# Altium PCB msp430_EMC_v1.0_fucu.PcbDoc (part 2 of 2)
Units mil, origin at the board's own origin, x right, y up, seen from the top; angles counter-clockwise.
Board outline 6328.11 x 4921.26 mil, 2 copper layers (Top Layer, Bottom Layer); 186 components, 146 nets, 623 pads, 75 vias.
Unrouted connection lines stored in the file: 47.
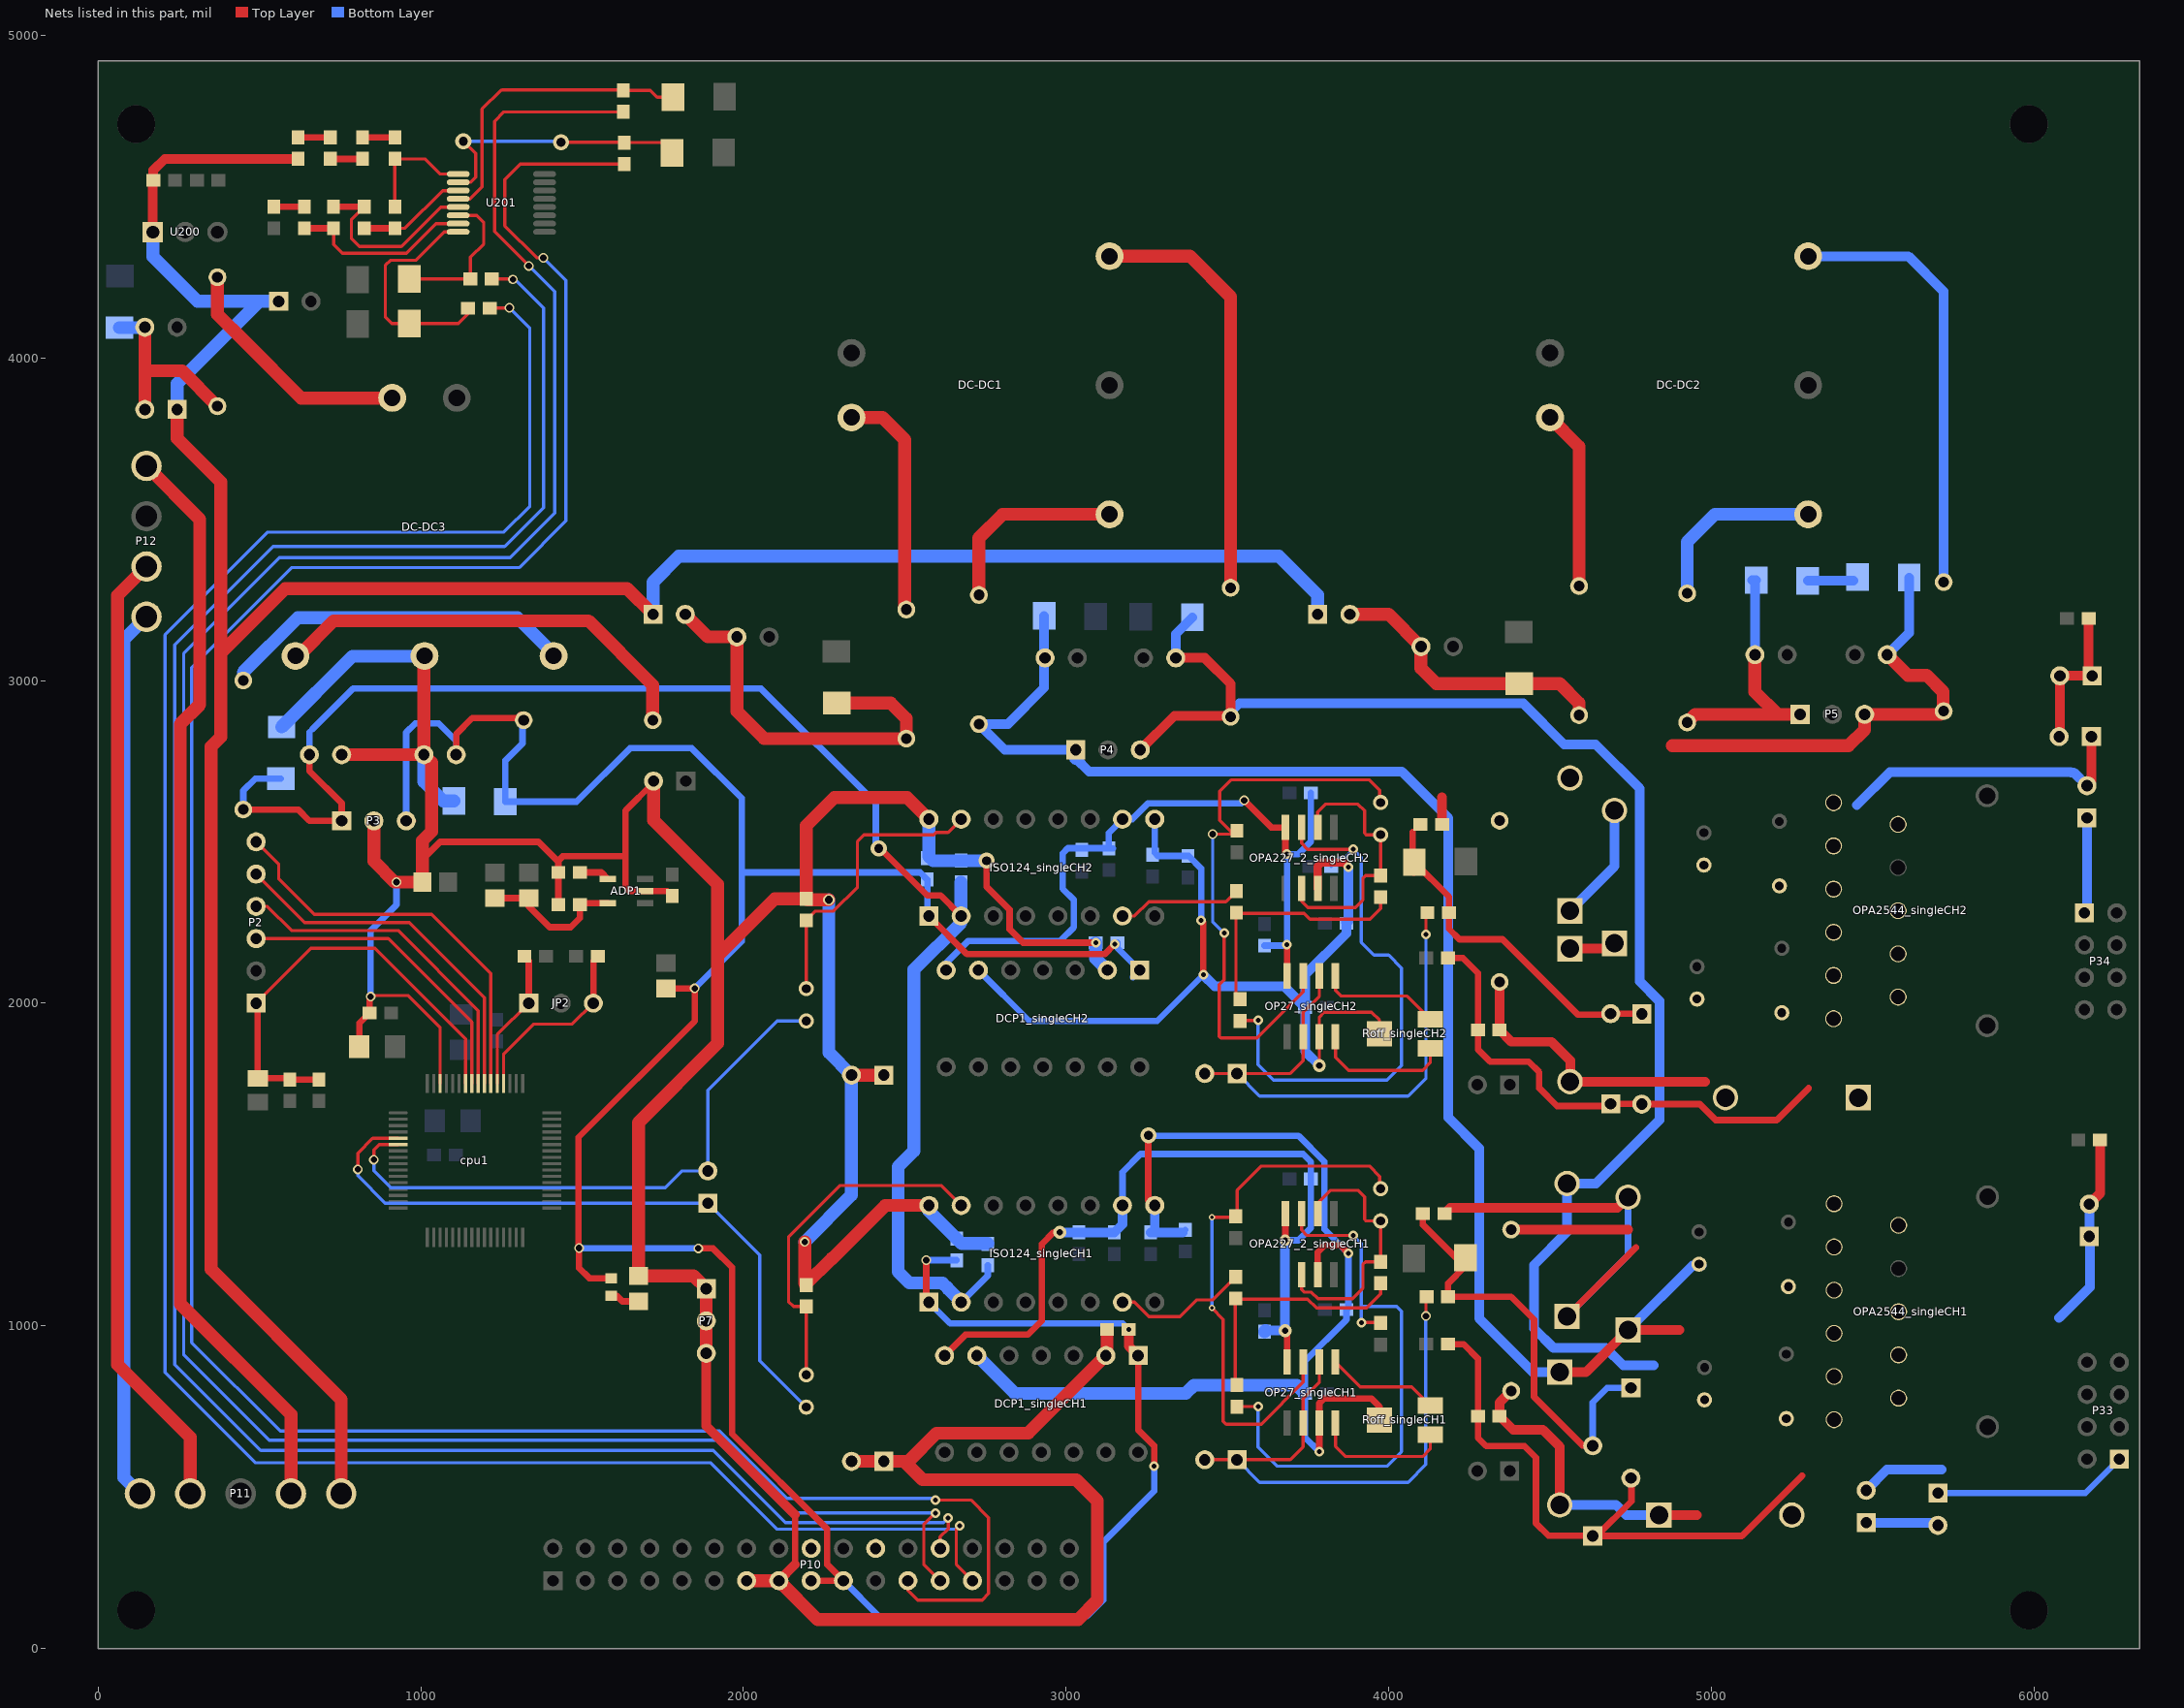
[diagram p2: the nets of this part, all layers, seen from the top]

## Via types
v1: diameter 30, hole 15, Top Layer to Bottom Layer, 29 vias
v2: diameter 30, hole 20, Top Layer to Bottom Layer, 25 vias
v3: diameter 40, hole 20, Top Layer to Bottom Layer, 10 vias
v4: diameter 50, hole 28, Top Layer to Bottom Layer, 6 vias
v5: diameter 20, hole 10, Top Layer to Bottom Layer, 2 vias
v6: diameter 35, hole 17, Top Layer to Bottom Layer, 1 vias
v7: diameter 35, hole 25, Top Layer to Bottom Layer, 1 vias
v8: diameter 50, hole 30, Top Layer to Bottom Layer, 1 vias

## Nets (pads, with @x,y where several pads share a name; then routed paths per layer and width w, separated by ;. In a path a pad name is that pad's centre, name@x,y a point inside that pad or via, vN(x,y) a via of type N, cw(c..) or ccw(c..) an arc to the next point about the centre after c; other vN are vias at no path point) (continued)
GNDB: ADP1.2 C1.2 C2.2 C3.2 C12.1 C13.1 C16_singleCH1.2 C16_singleCH2.2 cpu1.62 CT3_singleCH1.2 CT3_singleCH2.2 CT4_singleCH1.1 CT4_singleCH2.1 DC-DC3.4 DCP1_singleCH1.2 DCP1_singleCH2.2 GNDB1_singleCH1.1 GNDB1_singleCH1.2 GNDB1_singleCH2.1 GNDB1_singleCH2.2 ISO124_singleCH1.16 ISO124_singleCH2.16 LED10.2 P3.2 P7.1 P7.2 P7.3 P8.2 P10.13 P10.15 P_C8.2 P_C9.1 R5.2 Rf_singleCH1.1 Rf_singleCH2.1 TVS13.2 TVS14.1 | length 14540.6
  Top Layer w10: v2@841.54,2023.46 961.54,2023.46 1059.92,1925.08 cpu1.62@1059.92,1750.55
  Top Layer w20: C12.1@809.88,1865 809.88,1938.35 C13.1@841.54,1970 v2@841.54,2023.46 ; 1005.63,2445.63 1060,2500 1365.2,2500 1425,2440.2 ; C2.2@1426.54,2305.2 C3.2@1426.54,2405.2 1426.54,2438.66 1425,2440.2 ; 1630.96,2455.2 1440,2455.2 1425,2440.2 ; P8.2@1720.13,2682.24 1635,2597.11 1635,2360.2 1647.6,2347.6 ADP1.2@1695,2347.6 C1.2@1764.13,2347.6 ; 2160,260 2160,415 ; v4(2753.39,2441.47) 2753.39,2361.65 2825.05,2289.99 2825.05,2229.02 2866.78,2187.3 v1(3092.06,2187.3)
  Top Layer w30: P7.3@1885,915 1885,690 2160,415 ; P10.15@2110,210 2160,260
  Top Layer w40: P_C9.1@755,2770 P_C8.2@1010,2770 ; P3.2@855,2565 855,2440 920,2375 v2(925,2375) R5.2@1005.63,2375 1005.63,2445.63 1005.63,2503.67 1034.05,2532.09 1034.05,2745.95 P_C8.2@1010,2770 ; DC-DC3.4@1010,3065 P_C8.2@1010,2770 ; P8.2@1720.13,2682.24 P8.2@1721.57,2680.8 ; P8.2@1721.57,2688.26 P8.2@1721.57,2680.8 ; P7.3@1885,915 P7.2@1885,1015 P7.1@1885,1115 1845.63,1154.37 LED10.2@1675,1154.37 1675,1630 1920.29,1875.29 1920.29,2146.05 ; P10.13@2010,210 P10.15@2110,210 2230,90 3037.45,90 3097.06,149.61 3097.06,458.15 3032.17,523.03 2555.79,523.03 2498.82,580 ; Rf_singleCH1.1@2190,1131.54 v2(2190,1260) ; Rf_singleCH1.1@2192.4,1127.4 2273.93,1208.94 ; v7(2265,2320) 2198.46,2320 Rf_singleCH2.1@2195,2323.46 ; 2275.89,1208.77 2440.19,1373.07 ISO124_singleCH1.16@2575,1373.07 ; GNDB1_singleCH1.2@2335,580 GNDB1_singleCH1.1@2435,580 2498.82,580 ; GNDB1_singleCH2.2@2335,1776.93 GNDB1_singleCH2.1@2435,1776.93 ; ISO124_singleCH2.16@2575,2570 2507.47,2637.53 2282.45,2637.53 2195,2550.07 Rf_singleCH2.1@2195,2323.46 ; C16_singleCH1.2@3127.03,988.86 3127.03,911.38 DCP1_singleCH1.2@3123.53,907.88 2883.06,667.41 2598.87,667.41 2511.46,580 2498.82,580 ; P8.2@1721.57,2680.8 1721.57,2567.02 1920.29,2368.31 1920.29,2146.05 ; 1920.29,2146.05 2097.7,2323.46 Rf_singleCH2.1@2195,2323.46
  Bottom Layer w20: v2(845,2020) 845,2225 925,2305 v2(925,2375)
  Bottom Layer w40: TVS14.1@568.88,2855.87 788.01,3075 DC-DC3.4@1020,3075 ; P_C8.2@1010,2770 1010,2686.28 1069.63,2626.66 TVS13.2@1102.54,2626.66 ; v2(2190,1260) 2335,1405 GNDB1_singleCH2.2@2335,1776.93 2265,1846.93 v7(2265,2320) ; ISO124_singleCH1.16@2575,1373.07 2575,1356.1 CT3_singleCH1.2@2660.87,1270.23 2676.15,1254.95 2756.65,1254.95 CT4_singleCH1.1@2757.3,1254.3 ; ISO124_singleCH2.16@2575,2570 2575,2454.53 2588.06,2441.47 CT4_singleCH2.1@2674.42,2441.47 v4(2753.39,2441.47) ; v1(3092.06,2187.3) 3092.06,2138.64 DCP1_singleCH2.2@3128.48,2102.22
IN1: R205.1 R208.2 U201.1 | length 363.7
  Top Layer w10: R208.2@920,4468.46 R205.1@920,4616.54 1013.46,4616.54 1060.43,4569.57 U201.1@1116.14,4569.57
IN2: R208.1 R209.2 U201.3 | length 339.5
  Top Layer w10: R208.1@920,4401.54 951.54,4401.54 1068.39,4518.39 U201.3@1116.14,4518.39
  Top Layer w20: R209.2@825,4401.54 R208.1@920,4401.54
IN3: R209.1 R210.2 U201.5 | length 602.1
  Top Layer w10: R209.1@825,4468.46 785,4428.46 785,4370 810,4345 940,4345 1062.2,4467.2 U201.5@1116.14,4467.2
  Top Layer w20: R210.2@730,4468.46 R209.1@825,4468.46
IN4: R210.1 R211.2 U201.7 | length 575.3
  Top Layer w10: R210.1@730,4401.54 730,4351.63 757.27,4324.36 955.37,4324.36 1047.04,4416.02 U201.7@1116.14,4416.02
  Top Layer w20: R211.2@640,4401.54 R210.1@730,4401.54
IN_+12V: C200.2 P1.1 P11.5 P_F1.1 P_F2.1 P_F3.1 R200.2 U200.1 | length 8973.9
  Top Layer w30: U200.1@170,4390 170,4548.46 C200.2@171.54,4550 171.54,4581.54 206.54,4616.54 R200.2@620,4616.54
  Top Layer w40: P_F3.1@245,3840 245,3750 380,3615 380,3085 ; P11.5@753.62,480 753.62,771.38 350,1175 350,2795 380,2825 380,3085 ; P_F1.1@1720,3205 1640,3285 580,3285 380,3085
  Bottom Layer w40: U200.1@170,4390 170,4313.62 308.62,4175 500,4175 ; P_F3.1@245,3840 245,3920 500,4175 ; P1.1@560,4175 500,4175 ; P_F1.1@1720,3205 1720,3305 1800,3385 3660,3385 3780,3265 P_F2.1@3780,3205
LED_HIGH: P10.27 R207.2 | length 7145.7
  Top Layer w10: R207.2@1213.95,4154.09 v2@1274.09,4154.09 ; v1(2670,380) 2659.94,369.94 2659.94,260.06 P10.27@2710,210
  Bottom Layer w10: v2(1275,4155) 1338.14,4091.86 1338.14,3539.56 1258.3,3459.72 526.05,3459.72 207.75,3141.42 207.75,854.98 486.98,575.74 1898.05,575.74 2103.79,370 2660,370 v1(2670,380)
LED_LOW: P10.23 R203.2 | length 8208.8
  Top Layer w10: v2(1380,4310) 1360,4310 1261.01,4408.99 1261.01,4552.95 1308.39,4600.33 R203.2@1631.06,4600.33 ; P10.23@2510,210 2510,180 2540,150 2740,150 2760,170 2760,405 2705,460 v1(2595,460)
  Bottom Layer w10: v2(1380,4310) 1450,4240 1450,3494.85 1305.15,3350 600.06,3350 290,3039.94 290,947.98 564.45,673.53 1926.47,673.53 2135,465 2590,465 v1(2595,460)
LED_MEDIUM: P10.26 R206.2 | length 7073.7
  Top Layer w10: R206.2@1220.54,4244.7 1284.28,4244.7 v2(1285.92,4243.05) ; P10.26@2610,310 2610,345.82 2635,370.82 v1(2635,405)
  Bottom Layer w10: 237.48,879.78 237.48,3110.03 ; 237.86,879.8 504.13,613.53 1906.68,613.53 2130.21,390 2620,390 v1(2635,405) ; 237.86,3110.05 543.07,3415.27 1260.05,3415.27 1380.57,3535.79 1380.57,4154.43 v2@1290,4245
LED_MEDIUMLOW: P10.25 R204.2 | length 7984.8
  Top Layer w10: v2(1335,4285) 1228.98,4391.02 1228.98,4733.17 1257.98,4762.17 R204.2@1628.41,4762.17 ; v1(2595,420) 2559.21,384.21 2559.21,260.79 P10.25@2610,210
  Bottom Layer w10: v2(1335,4285) 1414.92,4205.08 1414.92,3518.8 1277.04,3380.92 562.29,3380.92 265.6,3084.23 265.6,909.6 530.2,645 1916.92,645 2141.92,420 v1(2595,420)
LI_12V: P11.4 P12.1 | length 3420.2
  Top Layer w40: P12.1@150,3665 315,3500 315,2925 255,2865 255,1067.72 597.72,725 P11.4@597.72,480
LI_CRG+: P11.2 P12.3 | length 3004
  Top Layer w40: P12.3@150,3353.19 60,3263.19 60,880 285.91,654.09 P11.2@285.91,480
LI_CRG-: P11.1 P12.4 | length 2767
  Bottom Layer w40: P11.1@130,480 80,530 80,3127.28 P12.4@150,3197.28
NetADP1_4: ADP1.4 C3.1 | length 94.9
  Top Layer w20: C3.1@1493.46,2405.2 1559.8,2405.2 ADP1.4@1580,2385
NetADP1_5: ADP1.5 C2.1 R3.2 R4.2 | length 450.8
  Top Layer w20: R3.2@1230,2325.63 R4.2@1335,2325.63 1335,2300 1399.8,2235.2 1465,2235.2 1493.46,2263.66 C2.1@1493.46,2305.2 ; C2.1@1498.46,2310.2 ADP1.5@1580,2310.2
NetC2_singleCH1_1: C2_singleCH1.1 R3_singleCH1.2 R4_singleCH1.1 | length 779
  Top Layer w10: R4_singleCH1.1@3524.49,816.54 3524.49,1082.79 3748.53,1082.79 3776.19,1055.13 3931.18,1055.13 3975,1098.94 C2_singleCH1.1@3975,1131.54
NetC2_singleCH1_2: C2_singleCH1.2 C3_singleCH1.1 OPA227_2_singleCH1.2 OPA227_2_singleCH1.6 | length 844.2
  Top Layer w10: OPA227_2_singleCH1.6@3730,1158.58 3730,1112.83 3738.62,1104.21 3760.48,1104.21 3780.75,1083.94 3887.67,1083.94 3920,1116.27 3920,1190 3928.46,1198.46 C2_singleCH1.2@3975,1198.46 C3_singleCH1.1@3975,1325 3930,1325 3925,1330 3925,1400 3905,1420 3820,1420 3780,1380 OPA227_2_singleCH1.2@3780,1347.56
NetC2_singleCH2_1: C2_singleCH2.1 R3_singleCH2.2 R4_singleCH2.1 | length 770
  Top Layer w10: R4_singleCH2.1@3526.78,2012.82 3526.78,2277.82 3737.65,2278.46 3756.22,2259.9 3941.76,2259.9 3975,2293.14 C2_singleCH2.1@3975,2328.46
NetC2_singleCH2_2: C2_singleCH2.2 C3_singleCH2.1 OPA227_2_singleCH2.2 OPA227_2_singleCH2.6 | length 833.2
  Top Layer w10: OPA227_2_singleCH2.6@3730,2355.51 3730,2316.32 3749.91,2296.41 3896.95,2296.41 3920,2319.46 3920,2386.93 3928.46,2395.39 C2_singleCH2.2@3975,2395.39 C3_singleCH2.1@3975,2521.93 3930,2521.93 3925,2526.93 3925,2596.93 3905,2616.93 3804,2616.93 3780,2592.92 OPA227_2_singleCH2.2@3780,2544.49
NetC3_singleCH1_2: C3_singleCH1.2 OP27_singleCH1.3 R6_singleCH1.2 | length 1710.6
  Top Layer w10: v5(3452.09,1055.05) 3487.01,1020.12 3487.01,704.41 3496.42,695 3605,695 3735,825 OP27_singleCH1.3@3735,887.56 ; v5(3452.09,1336.25) 3522.74,1336.25 R6_singleCH1.2@3525.81,1339.32 3530,1343.51 3530,1420 3605,1495 3940,1495 3971.93,1463.07 3971.93,1425 3975,1428.07 C3_singleCH1.2@3985,1428.07
  Bottom Layer w10: v5(3452.09,1055.05) v5(3452.09,1336.25)
NetC3_singleCH2_2: C3_singleCH2.2 OP27_singleCH2.3 R6_singleCH2.2 | length 1810.2
  Top Layer w10: v2(3454.36,2523.97) 3518.95,2523.97 3476.1,2566.82 3476.1,2656.67 3511.36,2691.93 3940,2691.93 3971.93,2660 3971.93,2621.93 3975,2625 C3_singleCH2.2@3985,2625 ; v1(3490,2216.93) 3490,2071.93 3475,2056.93 3475,1896.93 3480,1891.93 3592.27,1891.93 3735,2034.65 OP27_singleCH2.3@3735,2084.49
  Bottom Layer w10: v2(3454.36,2523.97) 3454.36,2252.57 v1(3490,2216.93)
NetC5_2: C5.2 cpu1.53 JP2.1 | length 421.5
  Top Layer w10: cpu1.53@1237.09,1750.55 1237.09,1902.09 JP2.1@1335,2000
  Top Layer w20: JP2.1@1335,2000 C5.2@1335,2131.54
NetC5_singleCH1_1: C5_singleCH1.1 OPA227_2_singleCH1.3 R4_singleCH1.2 | length 1803.6
  Top Layer w10: R4_singleCH1.2@3530,749.61 3594.61,749.61 v1(3595,750) ; OPA227_2_singleCH1.3@3730,1347.56 3730,1297.17 3747.17,1280 v1(3890,1280) ; v1(3915,1010) 3973.46,1010 C5_singleCH1.1@3975,1008.46
  Bottom Layer w10: v1(3595,750) 3595,624.53 3654.53,565 3995,565 4040,610 4040,1045 4025,1060 3915,1060 ; v1(3890,1280) 3915,1255 3915,1060 ; v1(3915,1010) 3915,1060
NetC5_singleCH2_1: C5_singleCH2.1 OPA227_2_singleCH2.3 R4_singleCH2.2 | length 1751.4
  Top Layer w10: R4_singleCH2.2@3530,1946.54 3594.61,1946.54 v1(3595,1946.93) ; OPA227_2_singleCH2.3@3730,2544.49 3730,2495.83 3748.9,2476.93 v1(3890,2476.93)
  Bottom Layer w10: v1(3595,1946.93) 3595,1809.38 3642.45,1761.93 3995,1761.93 4040,1806.93 4040,2109.04 3999.95,2149.09 3954.67,2149.09 3915,2188.76 3915,2451.93 v1(3890,2476.93) 3865,2451.93 3849.61,2451.93 C5_singleCH2.1@3821.65,2423.97
NetC6_2: C6.2 cpu1.52 JP2.3 | length 566.5
  Top Layer w10: cpu1.52@1256.77,1750.55 1256.77,1841.77 1350,1935 1470,1935 JP2.3@1535,2000
  Top Layer w20: JP2.3@1535,2000 C6.2@1535,2131.54
NetCf_singleCH1_2: Cf_singleCH1.2 ISO124_singleCH1.15 Rf_singleCH1.2 | length 1099.8
  Top Layer w10: Cf_singleCH1.2@2195,848.07 Rf_singleCH1.2@2195,1059.61 2155.39,1059.61 2140,1075 2140,1275 2300,1435 2613.07,1435 ISO124_singleCH1.15@2675,1373.07
NetCf_singleCH2_2: Cf_singleCH2.2 ISO124_singleCH2.15 Rf_singleCH2.2 | length 904.8
  Top Layer w10: Cf_singleCH2.2@2195,2045 Rf_singleCH2.2@2195,2256.54 2223.46,2285 2279.5,2285 2353.47,2358.97 2353.47,2501.4 2373.8,2521.73 2589.71,2521.73 2597.44,2529.47 2634.47,2529.47 ISO124_singleCH2.15@2675,2570
NetD1_singleCH1_1: D1_singleCH1.1 D2_singleCH1.2 OPA2544_singleCH1.7 R5_singleCH1.2 R7_singleCH1.1 TVS15_singleCH1.2 | length 1371
  Top Layer w20: R7_singleCH1.1@4106.19,1348.02 4106.19,1313.17 4208.44,1210.92 TVS15_singleCH1.2@4237.83,1210.92 4237.83,1185.17 4184.32,1131.66 R5_singleCH1.2@4184.32,1089.95 4379.59,1089.95 4450.21,1019.33 4450.21,779.89 4600.87,629.23
  Bottom Layer w20: D1_singleCH1.1@4632.2,628.26 4632.2,762.37 4677.43,807.6 D2_singleCH1.2@4750.72,807.6
NetD1_singleCH1_2: D1_singleCH1.2 D2_singleCH1.1 OPA2544_singleCH1.8 R2_singleCH1.2 R8_singleCH1.2 | length 1912.7
  Top Layer w20: R2_singleCH1.2@4183.46,943.07 4231.93,943.07 4276.54,898.46 R8_singleCH1.2@4276.54,720 4276.54,652.83 4302.18,627.18 4420.62,627.18 4456.62,591.18 4456.62,387.72 4494.63,349.7 4646.23,349.7 4752.44,455.92 D2_singleCH1.1@4752.44,520.67 ; D1_singleCH1.2@4632.2,348.74 5094.47,348.74 5281.04,535.31
NetD1_singleCH2_1: D1_CH2.1 D2_CH2.2 OPA2544_singleCH2.7 R5_singleCH2.2 R7_singleCH2.1 TVS15_singleCH2.2 | length 1051
  Top Layer w20: TVS15_singleCH2.2@4074.33,2408.26 TVS15_singleCH2.2@4077.86,2404.74 ; 4074.33,2529.81 4074.33,2442.06 TVS15_singleCH2.2@4079.4,2437 4186.86,2329.54 R5_singleCH2.2@4186.86,2280.99 4186.86,2230.02 4218.87,2198.01 4352.76,2198.01 4587,1963.77 4684.62,1963.77 D1_CH2.1@4688.19,1967.34 D2_CH2.2@4774.74,1967.34
NetD1_singleCH2_2: D1_CH2.2 D2_CH2.1 OPA2544_singleCH2.8 R2_singleCH2.2 R8_singleCH2.2 | length 1540.9
  Top Layer w20: R2_singleCH2.2@4183.46,2140 4230,2140 4276.54,2093.46 R8_singleCH2.2@4276.54,1916.93 4276.54,1856.48 4314.03,1818.99 4433.3,1818.99 4466.43,1785.86 4466.43,1736.25 4521.72,1680.96 4681.33,1680.96 D1_CH2.2@4688.19,1687.81 4783.64,1687.81 D2_CH2.1@4784.37,1687.08 4963.97,1687.08 5013.38,1637.66 5202.63,1637.66 5301.72,1736.75
NetD4_singleCH1_1: D4_singleCH1.1 D6_singleCH1.2 OPA2544_singleCH1.9 R8_singleCH1.1 Rg1_singleCH1.1 | length 939.1
  Top Layer w30: Rg1_singleCH1.1@4379.51,798.33 4343.46,762.29 R8_singleCH1.1@4343.46,720 4386.11,677.36 4478.18,677.36 4529.83,625.71 D4_singleCH1.1@4529.83,444.96 ; D6_singleCH1.2@4837.39,413.64 4955.56,413.64
  Bottom Layer w30: D4_singleCH1.1@4530.52,444.27 D4_singleCH1.1@4529.83,444.96 4704.91,444.96 4736.24,413.64 D6_singleCH1.2@4837.39,413.64
NetD4_singleCH2_1: D4_singleCH2.1 D6_singleCH2.2 OPA2544_singleCH2.9 R8_singleCH2.1 Rg1_singleCH2.1 | length 894.4
  Top Layer w20: Rg1_singleCH2.1@4343.46,2054.77 Rg1_singleCH2.1@4353.49,2064.8
  Top Layer w30: Rg1_singleCH2.1@4343.46,2054.77 R8_singleCH2.1@4343.46,1916.93 4380.22,1880.18 4504.63,1880.18 4562.5,1822.3 D4_singleCH2.1@4562.5,1756.93 ; D4_singleCH2.1@4561.99,1756.93 D4_singleCH2.1@4562.5,1756.93 ; 4980.73,1756.93 D4_singleCH2.1@4562.5,1756.93
NetD5_singleCH1_2: D5_singleCH1.2 D7_singleCH1.1 OPA2544_singleCH1.2 OPA2544_singleCH1.3 R7_singleCH1.2 | length 1339.7
  Top Layer w20: D5_singleCH1.2@4552.98,1029.25 4766.34,1242.61
  Top Layer w30: R7_singleCH1.2@4173.12,1348.02 4190.76,1365.66 4708.91,1365.66 D7_singleCH1.1@4742.07,1398.82
  Bottom Layer w20: D5_singleCH1.2@4552.98,1029.25 4553.14,1029.25 4742.07,1218.17 D7_singleCH1.1@4742.07,1398.82
NetD5_singleCH2_2: D5_singleCH2.2 D7_singleCH2.1 OPA2544_singleCH2.2 OPA2544_singleCH2.3 R7_singleCH2.2 | length 453.5
  Top Layer w30: R7_singleCH2.2@4165.29,2553.84 4165.29,2638.74
  Bottom Layer w30: D5_singleCH2.2@4561.65,2285.82 4699.96,2424.14 D7_singleCH2.1@4699.96,2597.1
NetDC-DC1_2: DC-DC1.2 P_L1.2 | length 714.9
  Top Layer w40: DC-DC1.2@2335,3815 2431.6,3815 2500,3746.6 P_L1.2@2500,3225
NetDC-DC1_3: DC-DC1.3 P_L3.1 | length 1328.9
  Top Layer w40: DC-DC1.3@3135,4315 3384.12,4315 3510,4189.12 P_L3.1@3509.99,3287.39
NetDC-DC1_5: DC-DC1.5 P_L2.1 | length 612.1
  Top Layer w40: P_L2.1@2730,3265 2730,3441.69 2803.31,3515 DC-DC1.5@3135,3515
NetDC-DC2_2: DC-DC2.2 P_L4.2 | length 559.7
  Top Layer w40: DC-DC2.2@4500,3815 4590,3725 4590,3292.72 P_L4.2@4589.9,3292.62
NetDC-DC2_3: DC-DC2.3 P_L6.1 | length 1366
  Bottom Layer w30: DC-DC2.3@5300,4315 5610.69,4315 5720,4205.69 P_L6.1@5720,3305
NetDC-DC2_5: DC-DC2.5 P_L5.1 | length 569.9
  Bottom Layer w40: P_L5.1@4925,3270 4925,3429.41 5010.59,3515 DC-DC2.5@5300,3515
NetDC-DC3_1: DC-DC3.1 P_L7.2 | length 772.7
  Top Layer w40: P_L7.2@370,4250 370,4135 455,4050 630,3875 DC-DC3.1@920,3875
NetDC-DC3_3: DC-DC3.3 P_L9.1 | length 1115.4
  Bottom Layer w40: P_L9.1@450,3000 450,3025.48 619.52,3195 1300,3195 DC-DC3.3@1420,3075
NetDC-DC3_5: DC-DC3.5 P_L8.1 | length 1336
  Top Layer w40: DC-DC3.5@620,3075 730,3185 1520,3185 1719.21,2985.79 P_L8.1@1719.21,2877.09
NetGDT1_singleCH1_2: OP27_singleCH1.2 OP27_singleCH1.6 R5_singleCH1.1 TEST1_singleCH1.1 TEST1_singleCH1.2 | length 1771.9
  Top Layer w10: TEST1_singleCH1.2@3430,585 TEST1_singleCH1.1@3530,585 3695,585 3735,625 OP27_singleCH1.6@3735,698.58 3735,775 3785,825 OP27_singleCH1.2@3785,887.56 ; v2(4115.24,1030) 4115.71,1030.48 R5_singleCH1.1@4115.71,1099.98
  Bottom Layer w10: TEST1_singleCH1.1@3530,585 3600,515 4060,515 4115,570 4115,1029.77 v2(4115.24,1030)
NetGDT1_singleCH2_2: OP27_singleCH2.2 OP27_singleCH2.6 R5_singleCH2.1 TEST1_singleCH2.1 TEST1_singleCH2.2 | length 1757.7
  Top Layer w10: TEST1_singleCH2.2@3430,1781.93 TEST1_singleCH2.1@3530,1781.93 3695,1781.93 3735,1821.93 OP27_singleCH2.6@3735,1895.51 3735,1971.93 3785,2021.93 OP27_singleCH2.2@3785,2084.49 ; v1(4115.5,2212.47) 4115.5,2276.56 R5_singleCH2.1@4119.93,2280.99
  Bottom Layer w10: TEST1_singleCH2.1@3530,1781.93 3600,1711.93 4060,1711.93 4115.5,1767.43 v1(4115.5,2212.47)
NetISO124_singleCH1_7: ISO124_singleCH1.7 R3_singleCH1.1 | length 420.3
  Top Layer w10: ISO124_singleCH1.7@3175,1073.07 3212.03,1073.07 3256.56,1028.54 3343.78,1028.54 3352.85,1028.54 3404.35,1080.05 3454.09,1080.05 R3_singleCH1.1@3525.79,1151.75
NetISO124_singleCH2_7: ISO124_singleCH2.7 R3_singleCH2.1 | length 385.1
  Top Layer w10: ISO124_singleCH2.7@3175,2270 3212.03,2270 3256.56,2314.53 3495.12,2314.53 R3_singleCH2.1@3528.02,2347.43
NetJumper1_singleCH1_1: J1_CH1.1 J2.2 OPA2544_singleCH1.1 Rg1_singleCH1.2 | length 588.8
  Top Layer w30: Rg1_singleCH1.2@4379.51,1298.33 4742.58,1298.33
  Bottom Layer w30: J1_CH1.1@5479.87,389.92 5694.02,389.92 J2.2@5702.19,381.75
NetJumper1_singleCH1_2: J1_CH1.2 R1_singleCH1.1 Test2_singleCH1.1 Test2_singleCH1.2 | length 866.9
  Top Layer w30: Test2_singleCH1.2@6171.22,1376.96 6204.25,1409.98 R1_singleCH1.1@6204.25,1576.54
  Bottom Layer w30: J1_CH1.2@5479.87,489.92 5544.06,554.1 5714.29,554.1 ; 6077.77,1024.28 6172.73,1119.24 6172.73,1275.45 Test2_singleCH1.1@6171.22,1276.96 Test2_singleCH1.2@6171.22,1376.96
NetJumper1_singleCH2_1: Jumper1_singleCH2.1 Jumper2_singleCH2.2 OPA2544_singleCH2.1 Rg1_singleCH2.2 | length 931.3
  Top Layer w30: Jumper2_singleCH2.2@6164.14,2673.89 6177.71,2687.47 Jumper1_singleCH2.1@6177.71,2826.18
  Bottom Layer w30: 5450.85,2613.58 5553.5,2716.23 6114.06,2716.23 6115.23,2715.07 6122.96,2715.07 Jumper2_singleCH2.2@6164.14,2673.89
NetJumper1_singleCH2_2: Jumper1_singleCH2.2 R1_singleCH2.1 Test2_singleCH2.1 Test2_singleCH2.2 | length 471.8
  Top Layer w30: Jumper1_singleCH2.2@6077.71,2826.18 6079.9,2828.36 Test2_singleCH2.2@6079.9,3014.4 Test2_singleCH2.1@6179.9,3014.4 6169.14,3025.16 R1_singleCH2.1@6169.14,3192.58
NetLED10_1: LED10.1 R60.1 | length 92
  Top Layer w20: R60.1@1590,1092.44 1608.19,1092.44 1625,1075.63 LED10.1@1675,1075.63
NetOP27_singleCH1_1: OP27_singleCH1.1 Roff_singleCH1.CCW | length 349.3
  Top Layer w10: OP27_singleCH1.1@3835,887.56 3911.65,810.91 4071.18,810.91 Roff_singleCH1.CCW@4128.74,753.35
NetOP27_singleCH1_8: OP27_singleCH1.8 Roff_singleCH1.CW | length 432.7
  Top Layer w10: OP27_singleCH1.8@3835,698.58 3835,626.53 3866.53,595 4105,595 4128.74,618.74 Roff_singleCH1.CW@4128.74,662.8
NetOP27_singleCH2_1: OP27_singleCH2.1 Roff_singleCH2.CCW | length 375.6
  Top Layer w10: OP27_singleCH2.1@3835,2084.49 3835,2039.62 3852.69,2021.93 4057.09,2021.93 Roff_singleCH2.CCW@4128.74,1950.28
NetOP27_singleCH2_8: OP27_singleCH2.8 Roff_singleCH2.CW | length 427.6
  Top Layer w10: OP27_singleCH2.8@3835,1895.51 3835,1832.31 3875.38,1791.93 4105,1791.93 4128.74,1815.67 Roff_singleCH2.CW@4128.74,1859.72
NetP_C1_1: P_C1.1 P_F1.2 P_L1.1 TVS5.1 | length 1276.2
  Top Layer w40: P_F1.2@1820,3205 1890,3135 P_C1.1@1980,3135 1980,2904.64 2064.64,2820 P_L1.1@2505,2820 2505,2881.92 2456.92,2930 TVS5.1@2290,2930
NetP_C4_1: P_C4.1 P_F2.2 P_L4.1 TVS6.1 | length 900.7
  Top Layer w40: P_F2.2@3880,3205 4000,3205 P_C4.1@4100,3105 4100,3037.68 4147.68,2990 TVS6.1@4405,2990 4530,2990 4589.9,2930.1 P_L4.1@4589.9,2892.62
NetP_C7_1: P_C7.1 P_F3.2 P_L7.1 TVS7.1 | length 604.9
  Top Layer w40: P_F3.2@145,3840 145,3960 ; P_C7.1@145,4095 145,3960 ; P_L7.1@370,3850 260,3960 145,3960
  Bottom Layer w40: TVS7.1@66.2,4093.63 143.63,4093.63 P_C7.1@145,4095
NetR200_1: R200.1 R201.2 | length 100
  Top Layer w20: R200.1@620,4683.46 R201.2@720,4683.46
NetR201_1: R201.1 R202.2 | length 100
  Top Layer w20: R201.1@720,4616.54 R202.2@820,4616.54
NetR202_1: R202.1 R205.2 | length 100
  Top Layer w20: R202.1@820,4683.46 R205.2@920,4683.46
NetR203_1: R203.1 TVS4.1 U201.2 | length 849.8
  Top Layer w10: U201.2@1116.14,4543.98 1153.98,4543.98 1170,4560 1170,4633.69 v4(1132.13,4671.56) ; v4(1434.72,4668.29) 1630.03,4668.29 R203.1@1631.06,4667.26 1746.51,4667.26 TVS4.1@1778.99,4634.78
  Bottom Layer w10: v4(1132.13,4671.56) 1431.45,4671.56 v4(1434.72,4668.29)
NetR204_1: R204.1 TVS3.1 U201.4 | length 955
  Top Layer w10: U201.4@1116.14,4492.8 1152.8,4492.8 1190,4530 1190,4771.14 1247.97,4829.1 ; 1253.28,4830.13 R204.1@1633.71,4830.13 ; R204.1@1628.41,4829.1 1711.68,4829.1 1733.02,4807.77 TVS3.1@1781.79,4807.77
NetR206_1: R206.1 TVS2.1 U201.6 | length 456
  Top Layer w10: TVS2.1@964.96,4244.16 1153.07,4244.16 R206.1@1153.61,4244.7 ; U201.6@1116.14,4441.61 1173.03,4441.61 1195.32,4419.33 1195.32,4353.43 1153.61,4311.73 R206.1@1153.61,4257.88
NetR207_1: R207.1 TVS1.1 U201.8 | length 724.3
  Top Layer w10: U201.8@1116.14,4390.43 1072.52,4390.43 984.44,4302.36 905.37,4302.36 890.54,4287.53 890.54,4126.09 910.19,4106.43 TVS1.1@964.96,4106.43 1116.81,4106.43 1147.02,4136.65 R207.1@1147.02,4154.09
NetR211_1: R211.1 R212.2 | length 95
  Top Layer w20: R212.2@545,4468.46 R211.1@640,4468.46
NetTVS11_2: TVS11.2 TVS12.1 | length 142
  Bottom Layer w30: TVS11.2@5298.88,3309.14 TVS12.1@5440.89,3309.14
OUT1: J2.1 P33.1 | length 605.8
  Bottom Layer w20: J2.1@5702.19,481.75 6159.22,481.75 P33.1@6264.43,586.95
OUT1_C: P10.18
OUT2: Jumper2_singleCH2.1 P34.1 | length 297.3
  Bottom Layer w30: P34.1@6156.29,2279.86 6164.14,2287.7 Jumper2_singleCH2.1@6164.14,2573.89
OUT2_C: P10.22
RST1: C4.2 cpu1.58 DS1.1 P2.1 R1.1 | length 1394.7
  Top Layer w10: P2.1@490,2000 660,2170 857.78,2170 1138.66,1889.12 cpu1.58@1138.66,1750.55
  Top Layer w20: P2.1@490,2000 495,1995 DS1.1@495,1767.4 R1.1@591.06,1767.4 ; R1.1@595,1763.46 C4.2@685,1763.46
SIG_IN1: Cf_singleCH1.1 cpu1.5 P6.1 | length 2092.6
  Top Layer w10: v2(805,1485) 805,1535 851.26,1581.26 cpu1.5@930,1581.26
  Bottom Layer w10: v2(805,1485) 805,1465 890,1380 P6.1@1890,1380 2051.19,1218.81 2051.19,891.88 Cf_singleCH1.1@2195,748.07
SIG_IN2: Cf_singleCH2.1 cpu1.6 P6.2 | length 1868.9
  Top Layer w10: v2(855,1515) 855,1545 871.57,1561.57 cpu1.6@930,1561.57
  Bottom Layer w10: v2(855,1515) 855,1480 906.9,1428.1 1758.1,1428.1 1810,1480 P6.2@1890,1480 1890,1730 2105,1945 Cf_singleCH2.1@2195,1945
TCK: cpu1.57 P2.3 | length 966.2
  Top Layer w10: P2.3@490,2200 899.56,2200 1158.35,1941.21 cpu1.57@1158.35,1750.55
TDI: cpu1.55 P2.5 | length 1132.9
  Top Layer w10: P2.5@490,2400 640,2250 964.82,2250 1197.72,2017.11 cpu1.55@1197.72,1750.55
TDO: cpu1.54 P2.6 | length 1264.1
  Top Layer w10: P2.6@490,2500 560,2430 560,2385 670,2275 1034.19,2275 1217.4,2091.79 cpu1.54@1217.4,1750.55
TMS: cpu1.56 P2.4 | length 1048.1
  Top Layer w10: P2.4@490,2300 525,2300 600,2225 929.7,2225 1178.03,1976.67 cpu1.56@1178.03,1750.55
VCC1: C17_singleCH1.2 C18_singleCH1.1 D4_singleCH1.2 D7_singleCH1.2 OPA2544_singleCH1.5 OPA2544_singleCH1.6 P4.1 P_C2.1 P_L2.2 TVS9.1 | length 4710.6
  Top Layer w30: D4_singleCH1.2@4529.83,856.78 4611.84,856.78 D7_singleCH1.2@4742.07,987 4900.94,987
  Bottom Layer w30: TVS9.1@2932.1,3200.51 2932.1,3072.9 2932.1,2977.19 2819.91,2865 P_L2.2@2730,2865 2810,2785 P4.1@3030,2785 ; P4.1@3030,2759.23 3071.74,2717.49 4041.03,2717.49 4185,2573.52 4185,1645 4280,1550 4280,1023.26 4446.48,856.78 D4_singleCH1.2@4529.83,856.78 ; D7_singleCH1.2@4742.07,987 4942.15,1187.09 C18_singleCH1.1@4969.52,1187.09
  Bottom Layer w40: P_C2.1@2932.1,3072.9 P_C2.1@2935,3070 ; P4.1@3030,2759.23 P4.1@3030,2785
VCC2: C17_singleCH2.2 C18_singleCH2.1 D4_singleCH2.2 D7_singleCH2.2 OPA2544_singleCH2.5 OPA2544_singleCH2.6 P5.1 P_C5.1 P_L5.2 TVS11.1 | length 971.2
  Top Layer w30: D4_singleCH2.2@4561.99,2168.74 4697.98,2168.74 D7_singleCH2.2@4710.44,2181.2
  Top Layer w40: P_L5.2@4925,2870 4950,2895 5205,2895 ; P_C5.1@5135,3080 5135,2965 5205,2895 ; P5.1@5275,2895 5205,2895
  Bottom Layer w30: TVS11.1@5126.87,3311.14 TVS11.1@5138.88,3311.14 ; P_C5.1@5129.21,3085.79 P_C5.1@5135,3080 TVS11.1@5135,3303.01
VCC5V_singleCH1: C6_singleCH1.2 C9_singleCH1.2 C14_singleCH1.1 CT2_singleCH1.1 DCP1_singleCH1.6 ISO124_singleCH1.9 OP27_singleCH1.7 OPA227_2_singleCH1.7 Roff_singleCH1.W | length 3678.9
  Top Layer w10: Roff_singleCH1.W@3971.26,708.07 3971.26,749.43
  Top Layer w20: v4(3255.91,1590.61) 3254.55,1589.25 3254.55,1388.61 3270.09,1373.07 ISO124_singleCH1.9@3275,1373.07 ; OPA227_2_singleCH1.7@3780,1158.58 3780,1228.23 3801.23,1249.46 3850.54,1249.46 v1(3875,1225) ; v1(3785,610) OP27_singleCH1.7@3785,698.58 3785,760 3800,775 3945.69,775 3971.26,749.43
  Bottom Layer w10: C9_singleCH1.2@3869.15,1050 C9_singleCH1.2@3875,1055.85
  Bottom Layer w20: v4(3255.91,1590.61) 3254.55,1589.25 3720.14,1589.25 3800.8,1508.59 3800.8,1299.2 v1(3875,1225) C9_singleCH1.2@3875,1055.85 ; CT2_singleCH1.1@3262.2,1289.47 CT2_singleCH1.1@3275,1302.27 ; C14_singleCH1.1@3361.76,1289.47 C14_singleCH1.1@3369.62,1297.33 ; v1(3785,610) 3740.85,654.15 C6_singleCH1.2@3740.85,790 3740.85,890.85 3869.15,1019.15 C9_singleCH1.2@3869.15,1050
  Bottom Layer w30: CT2_singleCH1.1@3262.2,1289.47 C14_singleCH1.1@3361.76,1289.47 ; CT2_singleCH1.1@3275,1302.27 ISO124_singleCH1.9@3275,1373.07
  Bottom Layer w40: DCP1_singleCH1.6@2723.53,907.88 2840.78,790.63 3371.09,790.63 3396.42,815.96 3714.89,815.96 C6_singleCH1.2@3740.85,790
VCC5V_singleCH2: C6_singleCH2.2 C9_singleCH2.2 C14_singleCH2.1 CT2_singleCH2.1 DCP1_singleCH2.6 ISO124_singleCH2.9 OP27_singleCH2.7 OPA227_2_singleCH2.7 Roff_singleCH2.W | length 3041.2
  Top Layer w10: v3(3785,1806.93) OP27_singleCH2.7@3785,1895.51 3785,1956.93 3800,1971.93 3946.48,1971.93 3971.26,1947.14 Roff_singleCH2.W@3971.26,1905
  Top Layer w20: v1(3418.98,2257.09) 3425.24,2250.82 v1(3425.24,2087.67)
  Top Layer w25: OPA227_2_singleCH2.7@3780,2355.51 3780,2424.24 3791.99,2436.23 3860.7,2436.23 v1(3875,2421.93)
  Bottom Layer w10: C9_singleCH2.2@3869.15,2246.93 C9_singleCH2.2@3875,2252.78
  Bottom Layer w20: DCP1_singleCH2.6@2728.48,2102.22 2885.78,1944.92 3282.5,1944.92 v1(3425.24,2087.67) ; ISO124_singleCH2.9@3275,2570 3275,2465.86 3284.67,2456.19 C14_singleCH2.1@3377.65,2456.19 3380.34,2456.19 3418.98,2417.56 v1(3418.98,2257.09)
  Bottom Layer w30: v1(3425.24,2087.67) 3460.99,2051.93 3675.85,2051.93 C6_singleCH2.2@3740.85,1986.93 ; v3(3785,1806.93) 3740.85,1851.08 C6_singleCH2.2@3740.85,1986.93 ; C9_singleCH2.2@3867.81,2250.24 3869.15,2248.9 C9_singleCH2.2@3869.15,2246.93 3869.15,2216.08 3740.85,2087.78 C6_singleCH2.2@3740.85,1986.93 ; C9_singleCH2.2@3875,2252.78 v1(3875,2421.93)
VCC_+5V: C16_singleCH1.1 C16_singleCH2.1 CT3_singleCH1.1 CT3_singleCH2.1 DCP1_singleCH1.1 DCP1_singleCH2.1 ISO124_singleCH1.1 ISO124_singleCH2.1 P3.3 P10.17 P10.19 P_C8.1 P_L8.2 R6.2 R60.2 TVS13.1 | length 9725.6
  Top Layer w0: P3.3@955,2565 985,2565
  Top Layer w20: P_C8.1@1110,2770 1110,2833.72 1159.73,2883.45 P_L8.2@1312.85,2883.45 ; R60.2@1590,1147.56 1522.41,1147.56 1490.52,1179.45 v2(1490.52,1241.12) 1489.03,1242.61 1489.03,1584.03 1849.37,1944.37 v2(1849.37,2045.63) R6.2@1760,2045.63 ; v2(1860,1240) 1906.08,1240 1965,1181.08 1965,665 2260,370 2260,260 P10.19@2310,210 P10.17@2210,210 ; v2(2566.57,1203.3) 2566.57,1081.5 ISO124_singleCH1.1@2575,1073.07 ; ISO124_singleCH2.1@2575,2270 2693.25,2151.75 3049,2151.75 3049.2,2151.55 3107.77,2151.55 3107.97,2151.75 3119.42,2151.75 v1(3150.45,2182.78) ; DCP1_singleCH1.1@3223.53,907.88 3223.53,677.92 3273.06,628.4 v1(3273.06,565.29) v1@3272.66,564.89
  Top Layer w30: v1(3193.96,988.86) 3193.96,937.46 DCP1_singleCH1.1@3223.53,907.88
  Top Layer w40: P_L8.2@1312.85,2883.45 P_L8.2@1319.21,2877.09
  Bottom Layer w20: P3.3@955,2565 955,2838.89 982.74,2866.63 1056.18,2866.63 1110,2812.8 P_C8.1@1110,2770 ; P_L8.2@1315.57,2873.44 1315.57,2804.96 1262.54,2751.93 TVS13.1@1262.54,2624.66 1483.15,2624.66 1648.73,2790.23 1839.77,2790.23 1995,2635 1995,2405 ; v2(1490.52,1241.12) 1491.65,1240 v2(1860,1240) ; v2(1849.37,2045.63) 1995,2191.26 1995,2405 ; P10.19@2310,210 2420,100 3065,100 3115,150 3115,329.66 3273.06,487.71 v1(3273.06,565.29) ; v2(2566.57,1203.3) CT3_singleCH1.1@2660.87,1203.3 ; ISO124_singleCH1.1@2575,1073.07 2640.66,1007.41 3175.4,1007.41 v1(3193.96,988.86) ; ISO124_singleCH2.1@2575,2270 2570.24,2274.76 CT3_singleCH2.1@2570.24,2382.84 2548.08,2405 1995,2405 ; C16_singleCH2.1@3158.99,2187.3 3158.99,2171.71 DCP1_singleCH2.1@3228.48,2102.22 DCP1_singleCH2.1@3207.07,2080.81
  Bottom Layer w40: P_L8.2@1315.57,2873.44 P_L8.2@1319.21,2877.09
VEE1: C4_singleCH1.2 C8_singleCH1.2 D5_singleCH1.1 D6_singleCH1.1 OPA2544_singleCH1.10 OPA2544_singleCH1.11 P4.3 P_C3.2 P_L3.2 TVS10.2 | length 4485.9
  Top Layer w30: P4.3@3230,2785 3335.56,2890.56 P_L3.2@3489.44,2890.56 ; P_C3.2@3340,3070 3430,3070 3510,2990 P_L3.2@3509.99,2887.39
  Bottom Layer w30: P_C3.2@3340,3070 3340,3144.31 TVS10.2@3391.38,3195.69 ; P_L3.2@3501.3,2893.44 3536.86,2929 4416.72,2929 4543.81,2801.91 4641.35,2801.91 4777.7,2665.56 4777.7,2067.69 4838.9,2006.49 4838.9,1637.74 4642.22,1441.06 D5_singleCH1.1@4552.98,1441.06 4552.98,1291.17 4450.67,1188.86 4450.67,991.52 4511.24,930.95 4673.08,930.95 4726.58,877.45 4820.74,877.45
VEE2: C4_singleCH2.2 C8_singleCH2.2 D5_singleCH2.1 D6_singleCH2.1 OPA2544_singleCH2.10 OPA2544_singleCH2.11 P5.3 P_C6.2 P_L6.2 TVS12.2 | length 1458.2
  Top Layer w30: D6_singleCH2.1@5040.64,1710.41 D6_singleCH2.1@5043.76,1707.29
  Top Layer w40: 4878.92,2797.56 5425.19,2797.56 5475,2847.37 P5.3@5475,2895 P_L6.2@5710,2895 ; P_C6.2@5545,3080 5609.05,3015.95 5667.41,3015.95 5718.25,2965.11 P_L6.2@5718.25,2903.25
  Bottom Layer w30: D6_singleCH2.1@5040.64,1710.41 D6_singleCH2.1@5043.76,1707.29 ; P_C6.2@5545,3080 5612.93,3147.93 TVS12.2@5612.93,3319.18
VEE5V_singleCH1: C7_singleCH1.2 C13_singleCH1.2 C15_singleCH1.2 CT1_singleCH1.2 DCP1_singleCH1.7 ISO124_singleCH1.10 OP27_singleCH1.4 OPA227_2_singleCH1.4 | length 2466.4
  Top Layer w10: v6(3678.74,1265) v6@3680,1270
  Top Layer w20: DCP1_singleCH1.7@2623.53,907.88 2688.05,972.4 2881.62,972.4 2925,1015.78 2925,1252.91 2962.13,1290.04 v3(2980.65,1290.04) ; v3(3678.74,985) 3685,978.74 OP27_singleCH1.4@3685,887.56 ; v6@3680,1270 OPA227_2_singleCH1.4@3680,1347.56
  Bottom Layer w20: ISO124_singleCH1.10@3175,1373.07 3175,1476.19 3231.06,1532.25 3734.72,1532.25 3759.15,1507.82 C13_singleCH1.2@3759.15,1455 3759.15,1304.15 3720,1265 v6(3678.74,1265)
  Bottom Layer w30: v3(2980.65,1290.04) 2981.22,1289.47 C15_singleCH1.2@3039.51,1289.47 CT1_singleCH1.2@3149.54,1289.47 3175,1314.93 ISO124_singleCH1.10@3175,1373.07 ; C7_singleCH1.2@3618.46,985 v3(3678.74,985) v6(3678.74,1265)
  Bottom Layer w40: C7_singleCH1.2@3615,981.54 C7_singleCH1.2@3618.46,985
VEE5V_singleCH2: C7_singleCH2.2 C13_singleCH2.2 C15_singleCH2.2 CT1_singleCH2.2 DCP1_singleCH2.7 ISO124_singleCH2.10 OP27_singleCH2.4 OPA227_2_singleCH2.4 | length 2316.4
  Top Layer w10: v1@3680,2466.93 v1(3685,2461.93)
  Top Layer w20: v2(3552.11,2628.66) 3636.29,2544.49 OPA227_2_singleCH2.4@3680,2544.49 v1@3680,2466.93 ; OP27_singleCH2.4@3685,2084.49 v1(3685,2181.93)
  Bottom Layer w10: v1@3681.54,2178.46 v1(3685,2181.93)
  Bottom Layer w20: DCP1_singleCH2.7@2628.48,2102.22 2628.48,2124.43 2697.16,2193.11 2981.93,2193.11 3024.53,2235.7 3024.53,2319.53 2989.66,2354.39 2989.66,2464.03 3005.73,2480.09 3132.16,2480.09 CT1_singleCH2.2@3132.76,2479.5 ; CT1_singleCH2.2@3145.2,2479.5 CT1_singleCH2.2@3132.76,2479.5 ; v2(3552.11,2628.66) 3542.98,2619.53 3254.48,2619.53 3204.96,2570 ISO124_singleCH2.10@3175,2570 3132.76,2527.76 CT1_singleCH2.2@3132.76,2479.5 ; C7_singleCH2.2@3615,2178.46 v1@3681.54,2178.46 ; v1(3685,2181.93) v1(3685,2461.93) 3720,2461.93 3759.15,2501.08 C13_singleCH2.2@3759.15,2651.93
VEE_-5V: CT4_singleCH1.2 CT4_singleCH2.2 ISO124_singleCH1.2 ISO124_singleCH2.2 P3.1 P_C9.2 P_L9.2 TVS14.2 | length 4938.1
  Top Layer w20: P_L9.2@450,2600 620,2600 655,2565 P3.1@755,2565 755,2620 655,2720 P_C9.2@655,2770 ; v4(2419.66,2479.73) 2419.66,2484.16 2570.13,2333.68 2611.32,2333.68 ISO124_singleCH2.2@2675,2270
  Bottom Layer w20: P_L9.2@450,2600 450,2658.5 487.37,2695.87 TVS14.2@566.88,2695.87 ; P_C9.2@655,2770 655,2839.88 ; 664.99,2849.87 790.12,2975 2055,2975 2410.47,2619.53 2410.47,2493.34 2419.66,2484.16 v4(2419.66,2479.73) ; CT4_singleCH2.2@2674.42,2374.54 CT4_singleCH2.2@2677.11,2374.54 ; ISO124_singleCH1.2@2675,1073.07 2757.3,1155.37 CT4_singleCH1.2@2757.3,1187.37
  Bottom Layer w40: CT4_singleCH2.2@2674.42,2374.54 2674.42,2270.58 ISO124_singleCH2.2@2675,2270 2675,2250.22 2528.39,2103.61 2528.39,1541.66 2479.38,1492.65 2479.38,1167.8 2514.58,1132.6 2616.95,1132.6 2634.53,1115.02 2634.53,1113.54 ISO124_singleCH1.2@2675,1073.07
pads on no net: cpu1.7 cpu1.8 cpu1.9 cpu1.10 cpu1.11 DCP1_singleCH1.3 DCP1_singleCH1.4 DCP1_singleCH1.8 DCP1_singleCH1.9 DCP1_singleCH1.10 DCP1_singleCH1.11 DCP1_singleCH1.12 DCP1_singleCH1.13 DCP1_singleCH1.14 DCP1_singleCH2.3 DCP1_singleCH2.4 DCP1_singleCH2.8 DCP1_singleCH2.9 DCP1_singleCH2.10 DCP1_singleCH2.11 DCP1_singleCH2.12 DCP1_singleCH2.13 DCP1_singleCH2.14 ISO124_singleCH1.3 ISO124_singleCH1.4 ISO124_singleCH1.5 ISO124_singleCH1.6 ISO124_singleCH1.11 ISO124_singleCH1.12 ISO124_singleCH1.13 ISO124_singleCH1.14 ISO124_singleCH2.3 ISO124_singleCH2.4 ISO124_singleCH2.5 ISO124_singleCH2.6 ISO124_singleCH2.11 ISO124_singleCH2.12 ISO124_singleCH2.13 ISO124_singleCH2.14 JP2.2 OP27_singleCH1.5 OP27_singleCH2.5 OPA227_2_singleCH1.1 OPA227_2_singleCH1.5 OPA227_2_singleCH1.8 OPA227_2_singleCH2.1 OPA227_2_singleCH2.5 OPA227_2_singleCH2.8 OPA2544_singleCH1. OPA2544_singleCH1.4 OPA2544_singleCH2. OPA2544_singleCH2.4 P10.21 P10.29 P10.30 P10.31 P10.32 P10.33 P10.34 P33.2 P33.4 P33.5 P33.6 P33.7 P33.8 P34.2 P34.4 P34.5 P34.6 P34.7 P34.8 U201.10 U201.15

## Keep-outs
Keep-Out Layer:
  the board outline again, w10

## Other copper
Top Layer:
  rectangle net A+3.3V: 975,1715 1025,1785
  rectangle net D+3.3V: 905,1660 955,1730
  rectangle net GND: 1352.23,4441.78 1417.23,4520.17
  text "gu" at 2777,1601.8 h80

## Silkscreen, mask and mechanical layers (free items; w line width, h text height)
Top Overlay:
  lines w10: 395,2075 395,2300 ; 440,1840 540,1840 640,1840 ; 440,1845 440,1945 ; 545,2550 645,2550 ; 640,1830 640,2545
  text "Control & Stimulation" at 4051.87,4792.75 h60
  text "MENB-II-C v1.0" at 5007.55,4791.59 h60
  text "BY SHENQIAO  2017.3.9" at 4051.9,4670.84 h60
  text "EMC_TEST" at 4055,4558.16 h60
  text "IN_+12V" at 470,4240 h30
  text "GND" at 640,4085 h30
  text "1" at 384.94,3648.19 h30
  text "12V_Li" at 78.44,2916.37 h30
  text "GND" at 92.49,2826.76 h30
  text "VCC2" at 5187.31,2805.69 h30
  text "GND2" at 5330.74,2801.15 h30
  text "VEE2" at 5472.22,2798.72 h30
  text "Li_CRG+" at 78.44,2753.73 h30
  text "VEE1" at 3236.27,2693.78 h30
  text "GND1" at 3100.63,2692.85 h30
  text "VCC1" at 2967.52,2689.6 h30
  text "Li_CRG-" at 80.1,2684.03 h30
  text "GND" at 1655.77,2581.92 h30
  text "5V" at 1799.18,2581.92 h30
  text "-5V" at 716,2456.11 h30
  text "GND" at 829.26,2456.11 h30
  text "+5V" at 940.59,2454.83 h30
  text "GND2C" at 1944.33,1833.44 h30
  text "GND2" at 2133.58,1832.15 h30
  text "GND" at 2396.42,1680.38 h30
  text "GND1C" at 1964.16,1525.24 h30
  text "GND1" at 2165.69,1524.23 h30
  text "1:Li_CRG-" at 111,1256 h50
  text "2:Li_CRG+" at 111,1169 h50
  text "GND" at 1946.48,1097.32 h30
  text "3:GND" at 111,1082 h50
  text "+" at 1725,1005 h30
  text "4:12V_Li" at 111,1000 h50
  text "GND" at 1946.48,995.91 h30
  text "5:IN_+12V" at 111,913 h50
  text "GND" at 1955.7,882.51 h30
  text "1" at 115,720 h30
  text "2" at 271.25,720 h30
  text "3" at 427.5,720 h30
  text "4" at 583.75,720 h30
  text "5" at 740,720 h30

## Text inside footprints (layer, text, board x,y; h text height)
P10: Top Overlay "34" at 3080,295 h50; Top Overlay "33" at 3085,190 h50; Top Overlay "1" at 1275,185 h50; Top Overlay "2" at 1260,290 h50
P33: Top Overlay "8" at 6184.43,946.95 h50 r90; Top Overlay "7" at 6284.43,946.95 h50 r90; Top Overlay "1" at 6284.43,506.95 h50 r90; Top Overlay "2" at 6184.43,486.95 h50 r90
P34: Top Overlay "8" at 6236.29,1919.86 h50 r270; Top Overlay "7" at 6136.29,1919.86 h50 r270; Top Overlay "1" at 6136.29,2359.86 h50 r270; Top Overlay "2" at 6236.29,2379.86 h50 r270